# EAGLE board NEW デバッカー (EAGLE 9.6.2)
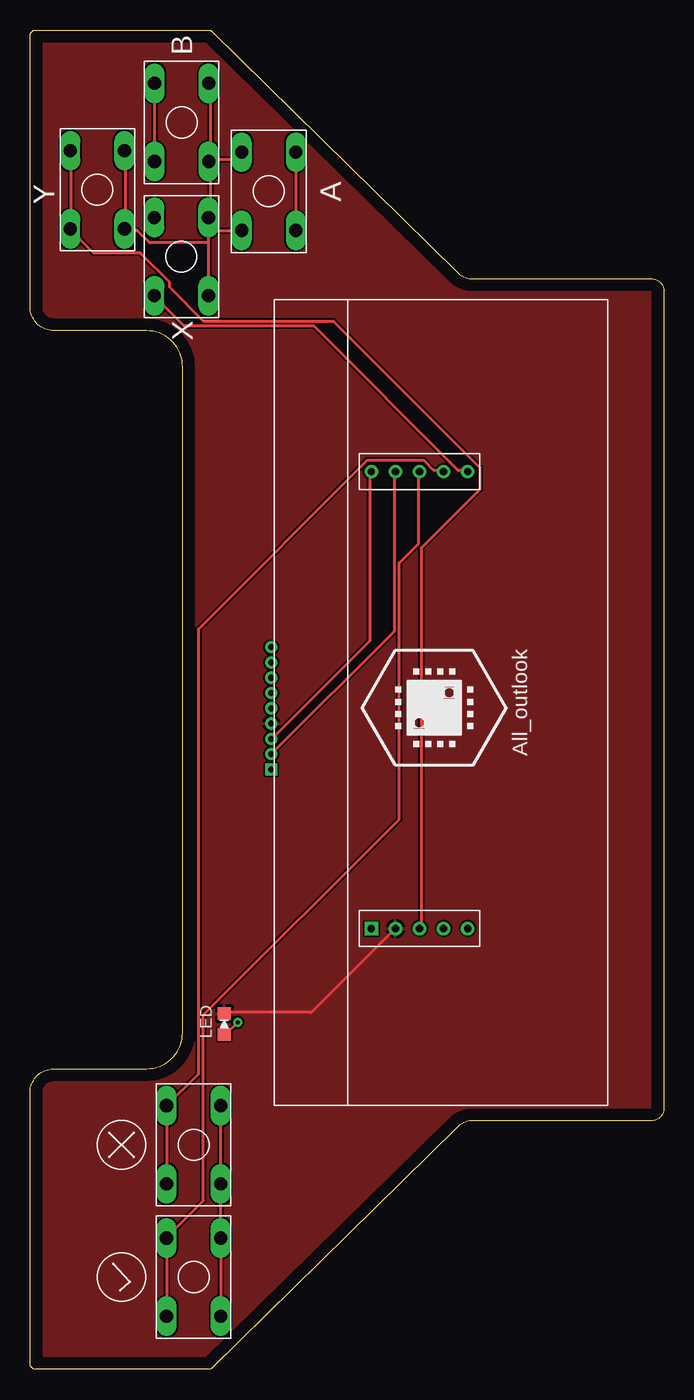
[diagram p0: board, top side]
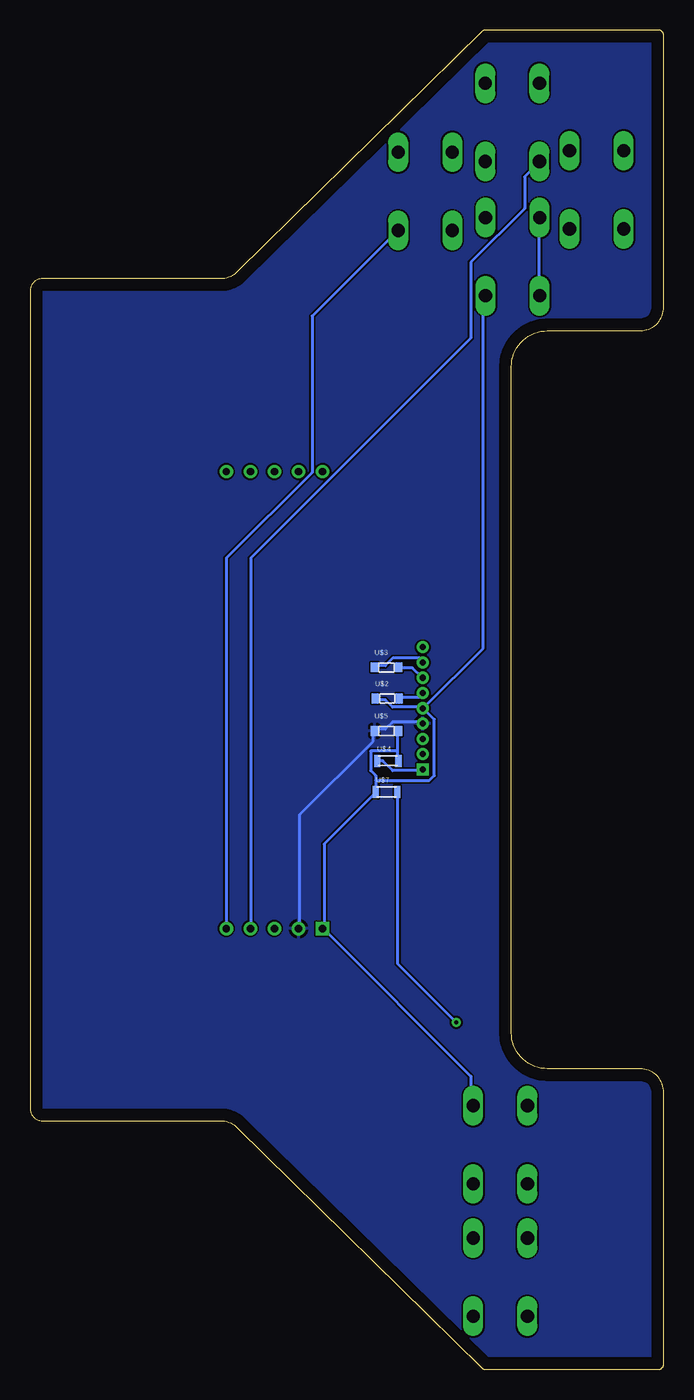
[diagram p1: board, bottom side, seen from below]

Size 52.68 x 111.36 mm. Coordinates in mm from the lower left corner, seen from the top.
Outline: 15.15,0.14 arc-45 14.8,0 0.5,0 arc-90 0,0.5 0,23 arc-90 2,25 9.68,25 arc90 12.68,28 12.68,83.36 arc90 9.68,86.36 2,86.36 arc-90 0,88.36 0,110.86 arc-90 0.5,111.36 14.8,111.36 arc-45 15.15,111.21 35.45,91.25 arc45 36.85,90.68 51.68,90.68 arc-90 52.68,89.68 52.68,21.68 arc-90 51.68,20.68 36.85,20.68 arc45 35.45,20.1 15.15,0.14
Copper layers (1*16): Top 0.035mm / dielectric 1.5mm / Bottom 0.035mm
Design rules "default": minimum track width 6mil, minimum drill 0.35mm, track to track 6mil, track to pad 6mil, pad to pad 6mil, via to via 6mil, smd to smd 6mil, copper to edge 40mil, drill to drill 6mil, minimum pad ring 10mil, minimum via ring 8mil, stop-mask expansion 4mil, vias tented up to drill 0mil, thermal gap 10mil
Net classes: 0 default: width 0.254 mm

## Footprints (pad centres in the part's own frame; a part is rotated, then mirrored left to right if it is on the bottom)
LED1608 = smd 1.05 x 1.08: A -0.875,0; K 0.875,0
LIQUIDCRYSTAL = drill 0.5 square: P$1 27.94,27.94 | drill 0.5: P$2 29.21,27.94; P$3 30.48,27.94; P$4 31.75,27.94; P$5 33.02,27.94; P$6 34.29,27.94; P$7 35.56,27.94; P$8 36.83,27.94; P$9 38.1,27.94
CON = smd 0.6 x 0.813: P$1 -1,0; P$2 1,0
1608 = smd 0.508 x 1.016: P$1 -0.889,0; P$2 0.889,0
TAKUTO6MM = drill 1.1 long: P$1 -3.25,2.25; P$2 3.25,2.25; P$3 -3.25,-2.25; P$4 3.25,-2.25
UI = drill 0.6 square: P$1 1,-1.5 | drill 0.6: P$2 3,-1.5; P$3 5,-1.5; P$4 7,-1.5; P$5 9,-1.5; P$6 9,36.5; P$7 7,36.5; P$8 5,36.5; P$9 3,36.5; P$10 1,36.5

## Placement (x,y rotation side)
LED  LED1608  [LED1608]  16.14,28.7 90 top
U$1  LIQUIDCRYSTAL  [LIQUIDCRYSTAL]  47.99,21.95 90 top
U$2  1608  [CON]  23,55.78 0 bottom
U$3  1608  [CON]  23.05,58.37 0 bottom
U$4  R  [1608]  22.95,50.6 0 bottom
U$5  1608  [CON]  23.05,53.09 0 bottom
U$6  TAKUTO6MM  [TAKUTO6MM]  5.6,98.07 90 top
U$7  R  [1608]  23.05,48.01 0 bottom
U$8  UI  [UI]  27.37,38.15 0 top
U$9  ALL  [ALL]  33.34,54.76 90 top
U$10  TAKUTO6MM  [TAKUTO6MM]  12.6,103.68 90 top
U$11  TAKUTO6MM  [TAKUTO6MM]  19.83,97.95 270 top
U$12  TAKUTO6MM  [TAKUTO6MM]  12.58,92.52 90 top
U$13  TAKUTO6MM  [TAKUTO6MM]  13.6,18.68 90 top
U$14  TAKUTO6MM  [TAKUTO6MM]  13.6,7.68 90 top

## Library data of the parts
LED = generic
U$1 = I2C液晶
U$2 U$3 U$5 = con1608
U$4 U$7 = R 1608
U$6 U$10-U$14 = タクト6mm正解
U$8 = UI
U$9 = All_outlook

## Nets
+5V: U$1.P$5 U$2.P$1 U$4.P$2 U$5.P$2 U$6.P$3 U$6.P$4 U$7.P$1 U$8.P$1 U$10.P$3 U$10.P$4 U$11.P$3 U$11.P$4 U$12.P$3 U$12.P$4 U$13.P$3 U$13.P$4 U$14.P$3 U$14.P$4
GND: LED.K U$1.P$4 U$5.P$1 U$8.P$2
N$1: LED.A U$7.P$2
N$5: U$1.P$7 U$3.P$2
N$6: U$1.P$8 U$3.P$1
N$7: U$1.P$6 U$2.P$2
N$13: U$1.P$1 U$4.P$1
S1: U$6.P$1 U$6.P$2 U$8.P$3
S2: U$8.P$4 U$10.P$1 U$10.P$2
S3: U$8.P$5 U$11.P$1 U$11.P$2
S4: U$8.P$6 U$12.P$1 U$12.P$2
S5: U$8.P$7 U$13.P$1 U$13.P$2
S6: U$8.P$8 U$14.P$1 U$14.P$2
SCL: U$1.P$2 U$8.P$9
SDA: U$1.P$3 U$8.P$10

## Tracks (layer width: path | path; a pad name or v marks a point on that pad's centre or on a via)
+5V
  Top 0.254: 15.02,100.58 16.85,100.58 17.46,101.19 U$11.P$3 | 15.02,100.58 15.02,106.88 U$10.P$4 | 15.02,100.58 U$10.P$3 15.02,100.38 15.02,95.91 U$12.P$4 | U$6.P$4 7.91,101.19 7.91,94.9 U$6.P$3 7.91,94.69 8.93,94.69 9.94,93.68 14.82,93.68 | 14.82,94.69 14.82,95.71 U$12.P$4 | 14.82,94.69 14.82,93.68 | 14.82,93.68 14.82,89.41 U$12.P$3 | 14.82,94.69 17.46,94.69 U$11.P$4 | 14.82,94.69 U$12.P$4 | U$14.P$3 15.83,4.47 15.83,10.77 U$14.P$4 15.83,10.97 15.83,15.24 U$13.P$3 15.83,15.44 15.83,21.74 U$13.P$4
  Bottom 0.254: U$2.P$1 23.96,55.68 23.15,55.68 22.54,55.07 20.1,55.07 U$1.P$5 | 22.13,51.41 22.13,50.6 U$4.P$2 | 22.13,51.41 22.13,53.04 U$5.P$2 | 23.96,48.97 23.96,49.38 24.37,49.78 24.37,51.41 22.13,51.41 | 23.96,48.97 23.96,48.16 U$7.P$1 23.96,47.96 28.23,43.69 28.23,36.78 U$8.P$1 28.23,36.58 16.04,24.38 16.04,21.95 U$13.P$4 | 23.96,48.97 19.49,48.97 19.09,49.38 19.09,54.05 19.9,54.86 U$1.P$5 | U$12.P$3 15.02,89.21 15.02,59.94 19.9,55.07 U$1.P$5
GND
  Top 0.254: LED.K 16.24,29.67 23.35,29.67 30.26,36.58 U$8.P$2
  Bottom 0.254: U$1.P$4 20.1,53.85 22.54,53.85 23.15,53.24 23.96,53.24 U$5.P$1 24.17,53.04 24.17,52.22 30.26,46.13 30.26,36.78 U$8.P$2
  pour Bottom: -17.4,133.68 -18.4,-11.32 61.6,-6.32 66.6,116.68
  pour Top: -23.4,139.68 -21.4,-17.32 74.6,-10.32 81.6,126.68
N$1  (via drill 0.35)
  Top 0.254: v17.26,28.86 16.24,27.84 LED.A
  Bottom 0.254: v17.26,28.86 22.13,33.73 22.13,47.96 U$7.P$2
N$5
  Bottom 0.254: U$3.P$2 21.93,58.32 20.91,58.32 20.1,57.51 U$1.P$7
N$6
  Bottom 0.254: U$3.P$1 23.96,58.52 23.15,58.52 22.54,59.13 20.3,59.13 20.1,58.93 U$1.P$8
N$7
  Bottom 0.254: U$2.P$2 21.93,55.88 20.3,55.88 20.1,56.08 U$1.P$6
N$13
  Bottom 0.254: U$4.P$1 23.35,50.6 22.54,49.78 20.1,49.78 U$1.P$1
S1
  Top 0.254: U$8.P$3 32.5,36.78 32.5,68.28 37.37,73.15 37.37,74.98 25.18,87.17 14.41,87.17 11.57,90.02 11.57,90.42 9.13,92.86 5.27,92.86 3.44,94.69 U$6.P$1 3.44,94.9 3.44,101.19 U$6.P$2
S2
  Top 0.254: U$10.P$2 10.35,106.88 10.35,100.58 U$10.P$1
  Bottom 0.254: U$8.P$4 34.33,36.78 34.33,67.46 16.04,85.75 16.04,92.05 11.57,96.52 11.57,99.16 10.35,100.38 U$10.P$1
S3
  Top 0.254: U$11.P$1 22.13,101.19 22.13,94.9 U$11.P$2
  Bottom 0.254: U$8.P$5 36.36,36.78 36.36,67.46 29.25,74.58 29.25,87.58 22.13,94.69 U$11.P$2
S4
  Top 0.254: U$8.P$6 36.36,74.78 35.54,74.78 23.56,86.77 12.79,86.77 10.35,89.21 U$12.P$1
  Bottom 0.254: U$12.P$2 10.35,95.71 10.35,89.41 U$12.P$1
S5
  Top 0.254: U$8.P$7 34.33,74.78 33.51,74.78 32.7,75.59 28.03,75.59 14.01,61.57 14.01,24.59 11.36,21.95 U$13.P$2 11.36,21.74 11.36,15.44 U$13.P$1
S6
  Top 0.254: U$8.P$8 32.29,74.58 32.29,68.68 30.67,67.06 30.67,45.72 14.41,29.46 14.41,14.02 11.36,10.97 U$14.P$2 11.36,10.77 11.36,4.47 U$14.P$1
SCL
  Top 0.254: U$1.P$2 30.26,61.37 30.26,74.58 U$8.P$9
SDA
  Top 0.254: U$1.P$3 20.1,52.43 28.23,60.55 28.23,74.58 U$8.P$10

## Text on the board
tPlace: B | Y | A | X